# Altium PCB thymio2-main.PcbDoc (part 2 of 4)
Units mm, origin at the board's own origin, x right, y up, seen from the top; angles counter-clockwise.
Board outline 107 x 105.75 mm, 2 copper layers (Top Layer, Bottom Layer), stack 1.591 mm thick; 334 components, 247 nets, 987 pads, 487 vias.
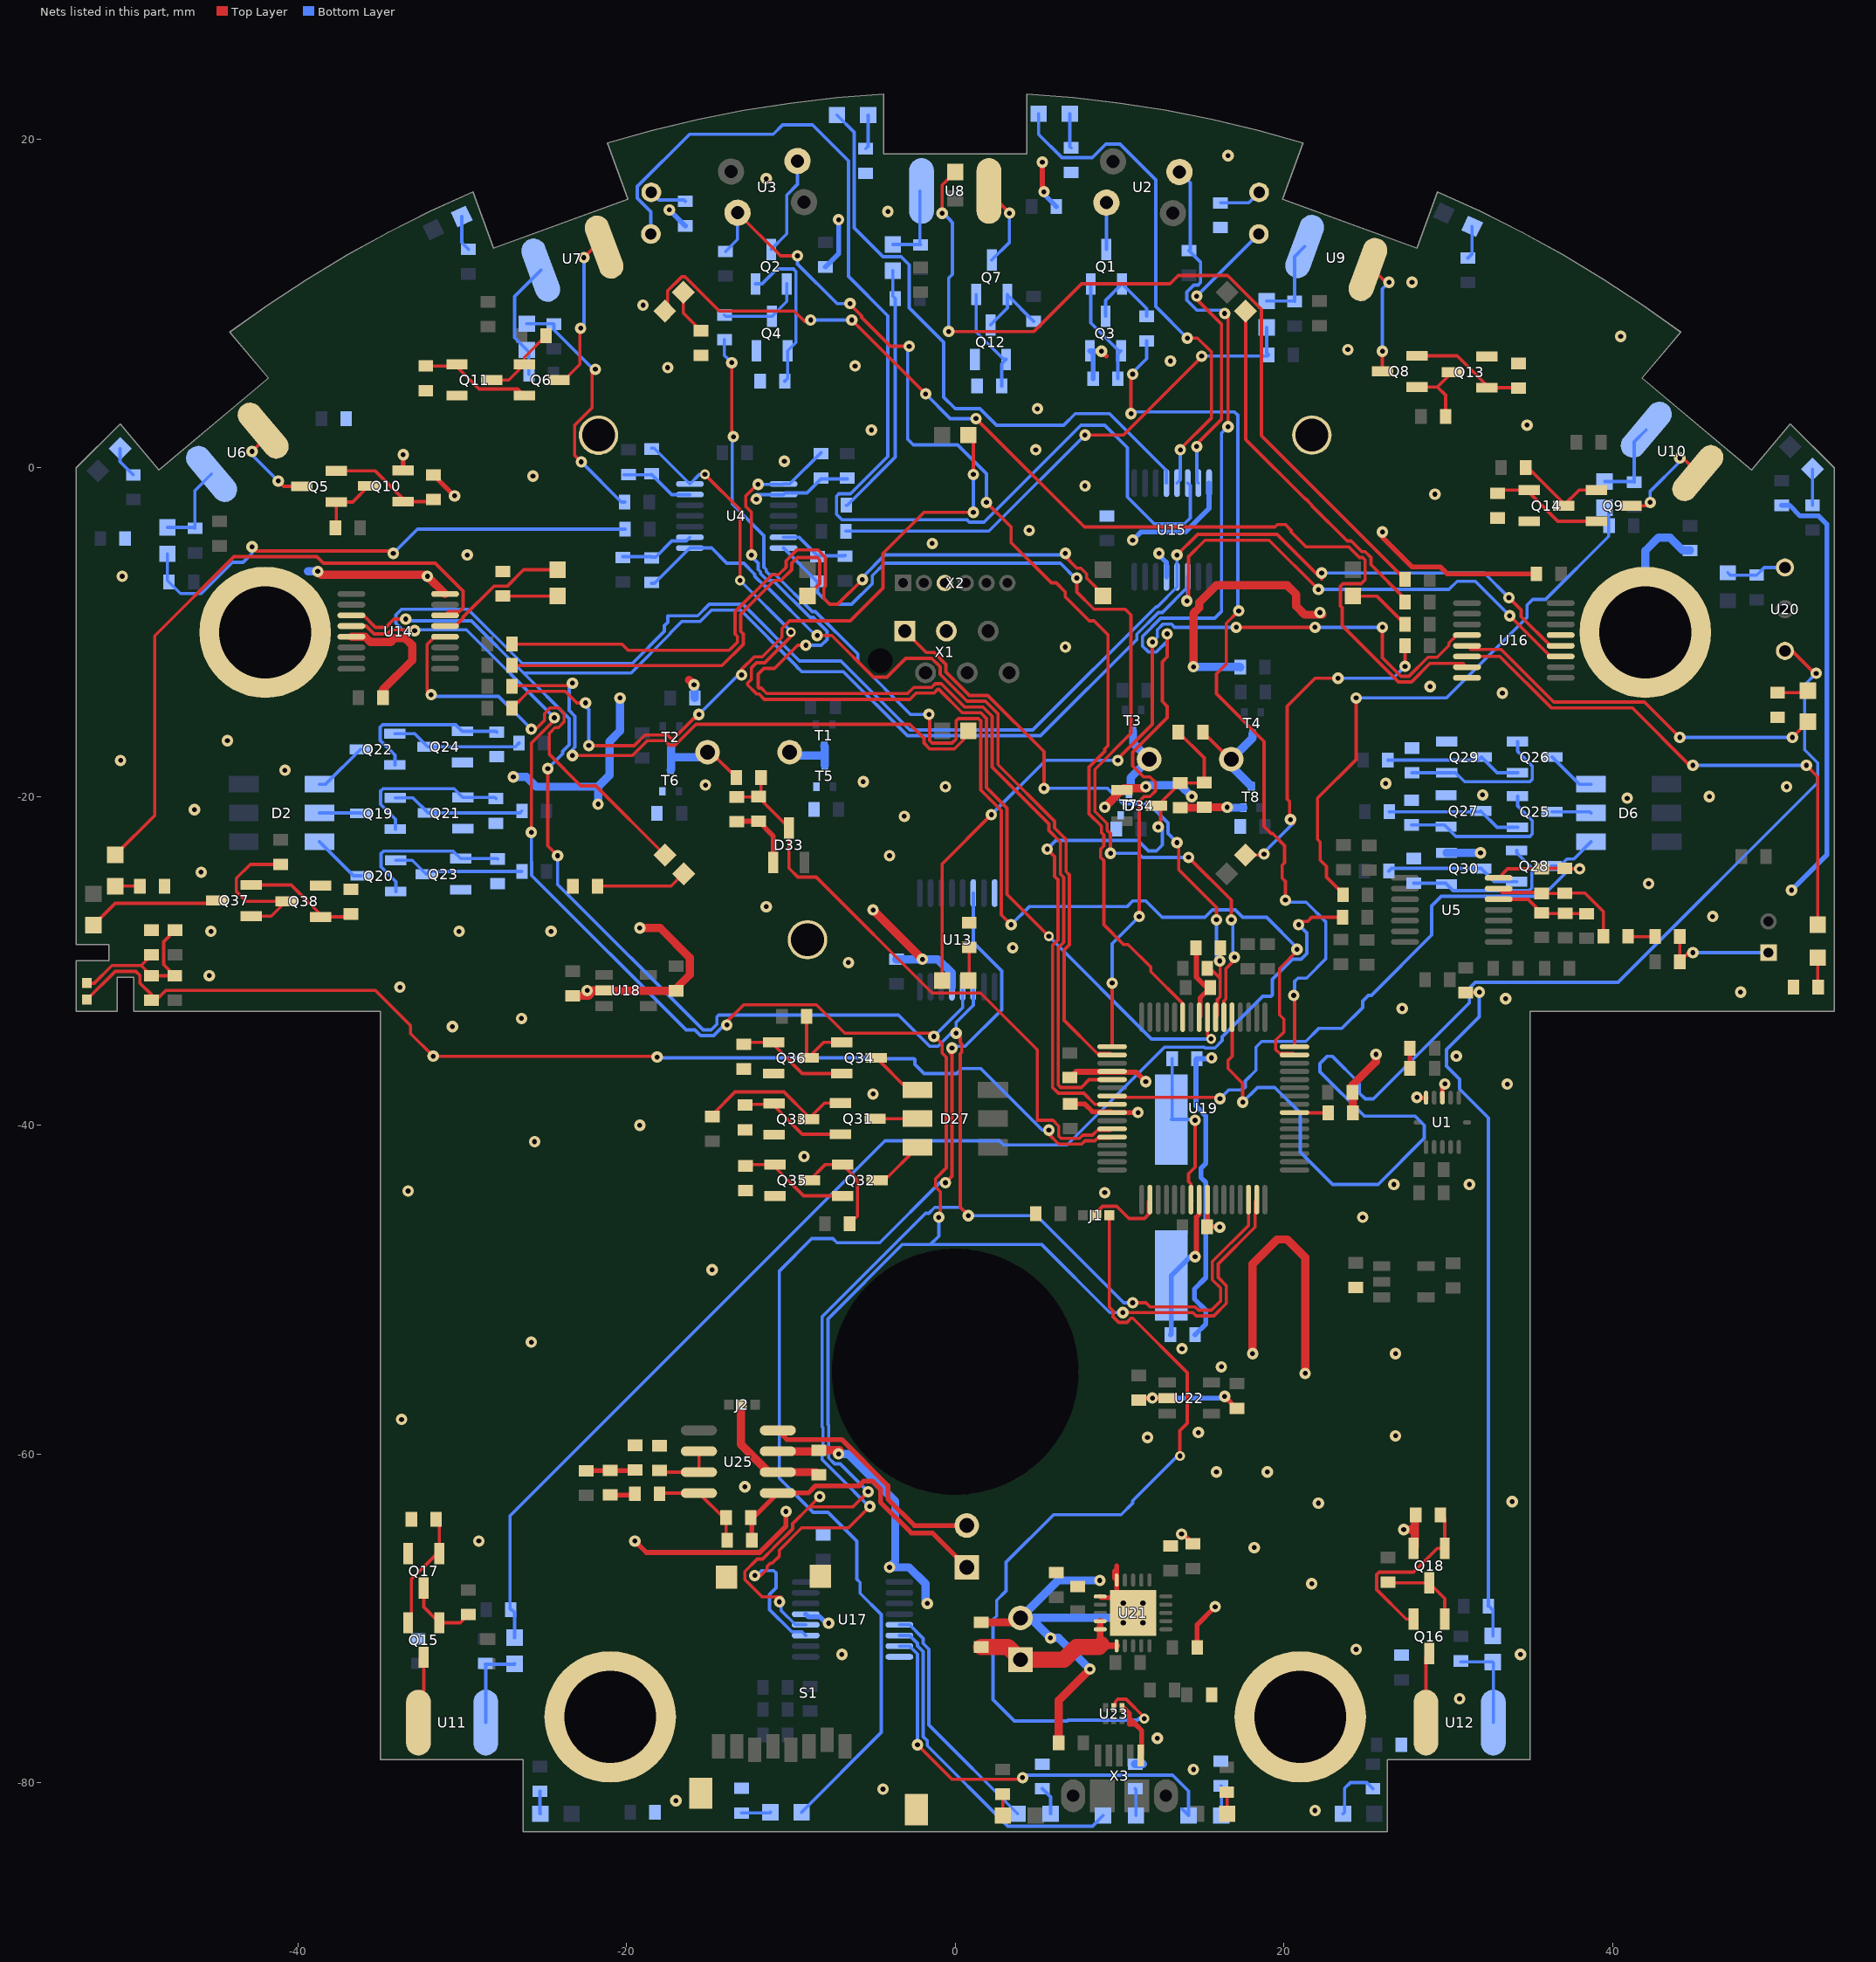
[diagram p2: the nets of this part, all layers, seen from the top]

## Via types
v1: diameter 0.7, hole 0.3, Top Layer to Bottom Layer, 458 vias
v2: diameter 0.6, hole 0.3, Top Layer to Bottom Layer, 25 vias
v3: diameter 0.66, hole 0.33, Top Layer to Bottom Layer, tented top, 4 vias

## Nets (pads, with @x,y where several pads share a name; then routed paths per layer and width w, separated by ;. In a path a pad name is that pad's centre, name@x,y a point inside that pad or via, vN(x,y) a via of type N, cw(c..) or ccw(c..) an arc to the next point about the centre after c; other vN are vias at no path point) (continued)
GND: BT1.2 C3.2 C4.2 C5.2 C7.2 C8.2 C9.2 C22.2 C25.2 C26.2 C27.2 C28.2 C29.2 C30.2 C31.2 C32.2 C33.2 C34.2 C35.2 C36.2 C37.2 C38.2 C39.2 C40.2 C41.2 C42.2 C44.2 C45.2 C46.2 C47.2 C48.2 C49.2 C51.2 C52.2 C53.2 C54.2 C59.1 C60.2 C61.2 C62.2 C68.2 C69.2 C70.2 C71.2 D33.1 D34.1 pad.0 pad.1@42,-10 pad.2 pad.3 Q3.2 Q4.2 Q10.2 Q11.2 Q12.2 Q13.2 Q14.2 Q17.2 Q18.2 Q21.2 Q23.2 Q24.2 Q27.2 Q29.2 Q30.2 Q33.2 Q35.2 Q36.2 Q38.2 R3.1 R5.1 R36.1 R37.1 R38.1 R39.1 R40.1 R54.1 R55.1 R66.1 R67.1 R68.1 R69.1 R70.1 R71.1 R72.1 R73.1 R82.1 R83.1 R84.1 R85.1 R86.1 R87.1 R88.1 R89.1 R95.1 R96.1 R97.1 R98.1 R99.1 R100.1 R108.1 R109.1 R110.1 R117.1 R118.1 R119.2 R120.2 R121.2 R122.2 R133.1 R134.1 R135.1 R138.1 R141.1 S1.S T5.2 T6.2 T7.2 T8.2 U1.8 U1.10 U13.8 U13.13 U14.8 U14.13 U15.8 U15.13 U16.8 U16.13 U17.8 U17.13 U18.2 U19.9 U19.20 U19.25 U19.41 U21.10 U21.11 U21.21 U22.2 U23.4 U25.7 X1.3 X2.3 X3.5 | length 294.5
  Top Layer w0.3: Q10.2@-33.6,-0.15 v1(-33.6,0.8) ; R36.1@-31.75,-0.425 v1(-30.475,-1.7) ; v1(-19.5,-65.3) -18.8,-66 -11.901,-66 -11.45,-65.549 -11.45,-65.541 -10.3,-64.391 v1(-10.3,-63.5) ; C53.2@-13.3,-21.525 -13.275,-21.5 R117.1@-11.975,-21.5 -11.075,-22.4 D33.1@-11.075,-24 ; v1(5.3,18.6) 5.3,16.9 v1(5.4,16.8) ; C35.2@6.975,-37.1 C35.2@7.3,-36.775 ; C39.2@7,-38.7 7.875,-38.7 8.35,-39.175 9.5,-39.175 U19.25@9.55,-39.225 v1(11.125,-39.225) ; U21.11@8.825,-68.675 8.9,-68.75 9.525,-68.75 10.45,-69.675 U21.21@10.825,-69.675 v3(10.225,-69.075) 9.825,-68.675 U21.10@9.825,-67.675 ; v1(8.9,7.1) 9.2,6.8 ; U19.20@9.55,-36.725 7.35,-36.725 C35.2@7.3,-36.775 ; 9.7,-67.143 9.7,-67.55 U21.10@9.825,-67.675 ; 9.825,-66.825 U21.10@9.825,-67.675 ; U23.4@10.15,-75.436 10.234,-75.436 10.609,-75.811 10.609,-76.09 ; C47.2@11.175,-56.725 11.3,-56.6 v1(12,-56.6) U22.2@12.9,-56.6 ; X3.5@11.3,-78.35 11.35,-78.3 11.35,-76.831 10.969,-76.45 ; v1(11.6,-37.35) 11.025,-36.775 C35.2@7.3,-36.775 ; v1(13.775,-64.875) 13.875,-64.875 R138.1@14.475,-65.475 ; C33.2@14.644,-29.194 14.675,-29.225 14.675,-30.999 15.301,-31.625 C38.2@15.525,-31.625 14.9,-32.25 14.9,-33.375 U19.9@14.85,-33.425 ; C44.2@14.725,-71.775 14.725,-70.394 v1(15.819,-69.3) ; U19.41@15.35,-44.525 15.35,-46.15 C36.2@15.325,-46.175 16.075,-46.175 v1(16.1,-46.2) ; v1(16.4,-56.5) 17.125,-57.225 C48.2@17.15,-57.225 ; v1(26,-3.9) 26,-4.219 27.806,-6.025 29.525,-6.025 29.95,-6.45 C29.2@35.375,-6.45 ; C3.2@27.675,-36.525 C4.2@27.675,-35.325 ; v1(28.1,-38.3) 28.125,-38.325 U1.10@28.65,-38.325 ; U1.8@29.65,-38.325 29.65,-37.635 v1(29.8,-37.485) ; 10.609,-76.09 10.969,-76.45 ; 10.609,-76.09 10.609,-76.45 10.969,-76.45
  Top Layer w0.5: v1(-38.8,-6.3) -38.6,-6.5 -32.225,-6.5 v1(-32.125,-6.6) U14.8@-31.05,-7.675 ; U14.13@-36.75,-10.275 -35.912,-10.275 -35.587,-10.6 -34.361,-10.6 -34.111,-10.35 -33.511,-10.35 -33.211,-10.65 -33.189,-10.65 -33.05,-10.789 -33.05,-11.706 -34.825,-13.481 C27.2@-34.825,-13.975 ; C31.2@-23.275,-32.125 -22.325,-32.125 -22.025,-31.825 ; U18.2@-21.375,-31.8 -22,-31.8 ; v1(-19.2,-28) -17.959,-28 -16.15,-29.809 -16.15,-30.841 -17,-31.691 C32.2@-17,-31.825 -22.025,-31.825 ; -16.2,-12.9 v1(-15.9,-13.2) ; U25.7@-10.8,-59.84 -8.365,-59.84 C61.2@-8.3,-59.775 -7.034,-59.775 -7.034,-59.934 v1(-7.1,-60) ; v1(-5,-26.9) v1(-2,-29.9) ; v1@-1.8,-69.1 v1(-1.7,-69.1) ; C45.2@1.575,-70.25 3.705,-70.25 BT1.2@3.975,-69.98 ; C46.2@6.3,-77.575 6.3,-75 v1(8.2,-73.1) ; v1(9.1,-20.65) D34.1@10.15,-19.6 10.25,-19.5 11.6,-19.5 v1(11.6,-19.4) ; C54.2@13.7,-20.675 15.125,-20.675 R118.1@15.15,-20.65 v1(16.55,-20.65) ; v1(14.5,-12.1) 14.5,-8.861 14.85,-8.511 14.85,-8.189 15.889,-7.15 20.211,-7.15 20.75,-7.689 20.75,-8.411 21.273,-8.934 22.354,-8.934 22.22,-8.8 v1(22.2,-8.8) ; v1(18.1,-53.9) 18.1,-48.439 19.589,-46.95 20.211,-46.95 21.3,-48.039 v1(21.3,-55.1) ; C34.2@24.2,-39.25 24.2,-38.025 C37.2@24.175,-38 24.175,-37.564 25.614,-36.125 v1(25.614,-35.686) ; v1(27.3,-64.6) 27.975,-64.6 ; Q18.2@27.9,-65.75 27.975,-65.675 27.975,-64.6 ; R55.1@27.975,-63.725 27.975,-64.6 ; -22.025,-31.825 -22,-31.8 ; -22.025,-31.825 -22.375,-31.825 v1(-22.4,-31.8) -22,-31.8
  Bottom Layer w0.3: v1(-17.4,15.7) R84.1@-16.425,14.725 ; U17.13@-9.1,-69.75 -8.925,-69.925 -8.228,-69.925 -7.853,-70.3 v1(-7.7,-70.3) ; C5.2@-7.9,12.225 -7.1,13.025 v1(-7.1,15.1) ; v1(5.4,16.8) 5.4,16.65 C7.2@6.15,15.9 ; R3.1@8.4,5.425 8.4,6.925 Q3.2@8.2,7.125 8.875,7.125 v1(8.9,7.1) ; v1(10.8,-4.4) 11.3,-3.9 14.014,-3.9 15.45,-2.464 U15.8@15.45,-0.925 ; v1(12,-56.6) 16.3,-56.6 v1(16.4,-56.5) ; v1(12.4,-5.2) 12.4,-5.3 12.85,-5.75 U15.13@12.85,-6.625 ; C42.2@14.6,-52.75 15.25,-52.1 15.25,-51.269 14.55,-50.569 14.55,-49.972 15.25,-49.272 15.25,-43.469 14.95,-43.169 14.95,-42.631 15.25,-42.331 15.25,-39.431 14.65,-38.831 14.65,-36 C41.2@14.7,-35.95 15.55,-35.95 v1(15.6,-35.9) ; v1(28.1,-38.3) v1@28.3,-38.3 ; v1(29.8,-37.485) v1@29.81,-37.485 ; C71.2@50.3,-2.275 50.775,-2.275 51.425,-2.925 52.549,-2.925 53.05,-3.426 53.05,-23.55 v1(50.9,-25.7)
  Bottom Layer w0.5: -39.4,-6.3 v1(-38.8,-6.3) ; v1(-26.9,-18.8) -26.1,-18.8 -25.5,-19.4 -21.739,-19.4 ; v1@-22.5,-31.8 v1(-22.4,-31.8) ; v1(-21.739,-20.461) -21.739,-19.4 ; v1(-20.4,-14) -20.4,-16.008 -21.05,-16.658 -21.05,-18.711 -21.739,-19.4 ; v1(-15.9,-13.2) -15.85,-13.25 C51.2@-15.85,-14 ; v1(-7.1,-60) -6.539,-60 -3.65,-62.889 -3.65,-66.55 v1(-4,-66.9) -2.812,-66.9 -1.8,-67.912 -1.8,-69 v1(-1.7,-69.1) ; C26.2@-3.575,-29.9 v1(-2,-29.9) -1.075,-29.9 -0.65,-30.325 -0.612,-30.325 -0.2,-30.737 U13.13@-0.2,-31.575 ; v1(8.2,-73.1) 6.3,-71.2 v1(5.8,-71.2) BT1.2@4.58,-69.98 ; v1(8.8,-67.7) 6.255,-67.7 BT1.2@3.975,-69.98 BT1.2@4.58,-69.98 ; v3(10.225,-70.275) 9.93,-69.98 BT1.2@4.58,-69.98 ; R96.1@10.95,-78.875 11.425,-78.875 ; v1(11.6,-19.4) 11.7,-19.3 13.7,-19.3 v1(14.4,-20) ; v1(14.5,-12.1) 17.325,-12.1 C52.2@17.35,-12.125 ; v1(16.55,-20.65) 16.575,-20.675 T8.2@17.525,-20.675 ; Q30.2@29.9,-23.425 v1(31.975,-23.425) ; pad.1@42,-10 42,-5.039 42.789,-4.25 43.511,-4.25 44.286,-5.025 C8.2@44.725,-5.025
  other v1: 21.9,-81.7 -17,-81.1 -4.4,-80.4 14.5,-79.2 12.3,-77.3 30.7,-74.9 -6.9,-72.2 34.4,-72.2 24.4,-71.9 21.7,-67.9 18.2,-65.7 -29,-65.3 22.1,-63 33.9,-62.9 -12.8,-62 15.9,-61.1 19,-61.1 11.7,-59 26.8,-58.9 14.8,-58.7 -33.7,-57.9 16.2,-54.7 26.8,-53.9 13.8,-53.6 -25.8,-53.2 -14.8,-48.8 24.8,-45.6 9.1,-44.1 -33.3,-44 26.7,-43.6 31.3,-43.6 -9.2,-41.9 -25.6,-41 -19.2,-40 -5,-38.1 33.6,-37.5 30.5,-35.8 -30.6,-34 -26.4,-33.5 27.2,-32.9 33.5,-32.3 47.8,-31.9 -33.8,-31.6 -45.4,-30.9 -6.5,-30.1 3.5,-29.2 -45.3,-28.2 -30.2,-28.2 -24.6,-28.2 46.1,-27.3 -11.5,-26.7 42.2,-25.3 -45.9,-24.6 -4,-23.6 -3.1,-21.2 -46.3,-20.8 40.9,-20.1 45.9,-20 32.1,-19.9 -0.6,-19.4 50.6,-19.4 -15.2,-19.3 26.2,-19.2 -5.6,-19.1 -40.8,-18.4 -50.8,-17.8 -44.3,-16.6 33.3,-13.7 28.9,-13.3 6.7,-10.9 -50.7,-6.6 -29.7,-5.3 -1.4,-4.6 4.5,-3.8 29.2,-1.6 7.9,-1.1 -25.7,-0.5 -10.4,0.4 4.9,1.1 22.3,2.2 -5.1,2.3 34.8,2.6 5,3.6 -17.5,6.1 -6.1,6.2 13.1,6.5 23.9,7.2 40.5,8 -19,9.9 27.8,11.3 -4.1,15.6 -11.5,17.6 16.6,19
  other v3: 11.425,-70.275 11.425,-69.075
INNTC2: R136.2 RT1.1 U19.28 | length 69.8
  Top Layer w0.2: RT1.1@-52.85,-32.35 -51.132,-30.632 -49.876,-30.632 -49.625,-30.883 -49.625,-31.354 -48.925,-32.054 R136.2@-48.925,-32.4 -48.654,-32.4 -48.054,-31.8 -35.281,-31.8 -33.15,-33.931 -33.15,-34.426 v1(-31.776,-35.8) -18.4,-35.8 -18.3,-35.9 -18.25,-35.85 v1(-18.148,-35.85) ; v1(5.7,-40.3) 5.7,-40.549 6.301,-41.15 7.699,-41.15 7.899,-40.95 8.504,-40.95 8.654,-40.8 9.475,-40.8 U19.28@9.55,-40.725
  Bottom Layer w0.2: v1(-18.148,-35.85) -18.25,-35.85 -18.3,-35.9 -5.195,-35.9 -5.145,-35.95 -2.493,-35.95 -2.45,-35.993 -2.45,-36.293 -1.893,-36.85 0.088,-36.85 0.387,-36.551 1.549,-36.551 5.297,-40.3 v1(5.7,-40.3)
IR_RECEIVER: U19.5 U20.1 | length 81.2
  Top Layer w0.2: U19.5@16.85,-33.425 16.85,-35.801 16.6,-36.051 16.6,-36.548 17.5,-37.448 v1(17.5,-38.6) ; U20.1@50.5,-11.14 50.94,-11.14 v1@52.35,-12.55
  Bottom Layer w0.2: v1(17.5,-38.6) 18.4,-37.7 19.449,-37.7 21,-39.251 21,-40.561 21,-41.638 22.962,-43.6 25.743,-43.6 28.55,-40.793 28.55,-40.006 27.993,-39.45 24.901,-39.45 22.2,-36.748 22.2,-36.251 22.651,-35.8 22.949,-35.8 24.6,-37.451 24.6,-38.048 24.951,-38.4 25.448,-38.4 31.3,-32.548 31.3,-31.651 31.651,-31.3 40.348,-31.3 52.5,-19.148 52.5,-17.951 51.7,-17.151 51.7,-13.2 v1(52.4,-12.5)
LED_CLK: U13.11 U14.11 U15.11 U16.11 U17.11 U19.46 | length 216.1
  Top Layer w0.2: U14.11@-36.75,-8.975 -36.01,-8.975 -35.285,-9.7 -34.663,-9.7 -34.163,-9.2 v1(-33.45,-9.2) ; v1(-24.8,-18.3) -24.8,-23 v1(-24.2,-23.6) ; -11.849,-67.4 -11.45,-67.001 -11.45,-66.855 -11.245,-66.65 ; -11.145,-66.65 -10.7,-66.205 -10.7,-65.851 -9.348,-64.5 -6.5,-64.5 v1(-5.2,-63.2) ; 0.3,-34.651 0.3,-34.951 0.4,-35.051 0.4,-35.548 0.3,-35.648 0.3,-45 v1(0.8,-45.5) ; v1(10.802,-50.8) 11.605,-50.8 11.855,-51.05 14.607,-51.05 14.806,-51.25 15.593,-51.25 16.15,-50.693 16.15,-49.906 15.65,-49.406 15.65,-48.293 17.85,-46.093 U19.46@17.85,-44.525 ; v1(14.1,-8.1) 14.2,-8 14.2,-5.401 15.201,-4.4 19.1,-4.4 v1(22.1,-7.4) ; v1(33.749,-9) 36.224,-11.475 U16.11@36.85,-11.475
  Bottom Layer w0.2: v1(-33.45,-9.2) -33.5,-9.2 -33.4,-9.3 -29.451,-9.3 -26.276,-12.476 ; v1(-24.8,-18.3) -23.9,-17.4 -23.9,-17.249 -23.5,-16.849 -23.5,-15.251 -26.276,-12.476 ; v1(-24.2,-23.6) -24.2,-25.349 -15.349,-34.2 -14.851,-34.2 -14.5,-33.849 -14.5,-33.4 -14.4,-33.3 -3.449,-33.3 -1.549,-35.2 -1.051,-35.2 -0.253,-34.401 v1(0.05,-34.401) 0.05,-33.75 1.1,-32.7 U13.11@1.1,-31.575 ; v1@-12.1,-67.4 -11.8,-67.1 -11.051,-67.1 -10.9,-67.251 -10.9,-68.151 -11.3,-68.551 -11.3,-69.476 -9.951,-70.825 -9.325,-70.825 U17.11@-9.1,-71.05 ; -8.1,-59.795 -8.1,-60.343 -6.15,-62.293 -6.15,-62.299 v1@-5.249,-63.2 ; -8.1,-58.355 -8.1,-51.645 -1.807,-45.351 -1.6,-45.351 -1.249,-45 0.3,-45 v1(0.8,-45.5) 4.952,-45.5 10.252,-50.8 v1(10.802,-50.8) ; -8.05,-59.745 -8.05,-58.405 ; v1(14.1,-8.1) 14.15,-8.05 U15.11@14.15,-7.251 ; U15.11@14.15,-6.625 U15.11@14.15,-7.251 ; v1(22.1,-7.4) 30.051,-7.4 30.551,-6.9 31.649,-6.9 v1(33.749,-9) ; -26.276,-12.476 -19.732,-12.476 -17.35,-10.093 -17.35,-10.05 -16.65,-9.35 -15.525,-9.35 -14.825,-8.65 -13.075,-8.65 -9.65,-12.075 -9.65,-12.088 -9.338,-12.4 -6.806,-12.4 -2.906,-16.3 5.195,-16.3 11.05,-10.445 11.05,-10.112 12.362,-8.8 12.601,-8.8 U15.11@14.15,-7.251
  other v1: -12.2,-67.4
LED_CS: U13.12 U14.12 U15.12 U16.12 U17.12 U19.47 | length 226.3
  Top Layer w0.2: U14.12@-36.75,-9.625 -35.855,-9.625 -35.38,-10.1 -34.568,-10.1 -34.318,-9.85 -32.95,-9.85 v1(-32.9,-9.9) ; v1(-25.8,-22.175) -25.8,-16.749 -24.4,-15.349 v1(-24.4,-15.2) ; v1(-13.9,-33.9) -13.9,-33.7 -12.875,-32.675 -8.45,-32.675 -6.725,-34.4 -1.5,-34.4 v1(-1.3,-34.6) -1.251,-34.6 -0.8,-35.051 -0.8,-35.605 -0.55,-35.855 -0.55,-42.601 -1.2,-43.251 -1.2,-43.749 -0.9,-44.049 -0.9,-45.5 v1(-1,-45.6) ; v1(-10.7,-69) -10.6,-68.9 -10.6,-68.7 -11.748,-68.7 -12.8,-67.648 -12.8,-67.151 -12.049,-66.4 -11.735,-66.4 -11.05,-65.715 -11.05,-65.707 -9.9,-64.557 -9.9,-64.251 -8.874,-63.226 ; v1(-8.249,-62.6) -8.874,-63.226 ; v1(-5.3,-62.3) -6.226,-63.226 -8.874,-63.226 ; v1(10.2,-51.4) 14.462,-51.4 14.661,-51.6 15.738,-51.6 16.5,-50.838 16.5,-49.761 16,-49.261 16,-48.438 18.25,-46.188 18.25,-44.625 U19.47@18.35,-44.525 ; v1(13.5,-5.3) 14.75,-4.05 19.599,-4.05 v1@22.124,-6.576 ; 22.3,-6.751 v1(22.3,-6.4) ; v1(33.7,-7.9) 34.45,-8.65 34.45,-9.051 36.224,-10.825 U16.12@36.85,-10.825
  Bottom Layer w0.2: v1(-25.8,-22.175) -25.8,-23.946 -25.775,-23.971 -25.775,-24.804 -16.379,-34.2 -15.843,-34.2 -15.493,-34.55 -14.707,-34.55 -13.9,-33.743 -13.9,-33.7 v1(-13.9,-33.9) ; v1(-24.4,-15.2) -29.75,-9.85 -32.85,-9.85 v1(-32.9,-9.9) -33.598,-9.9 -34.05,-9.449 -34.05,-8.951 -33.698,-8.6 -29.657,-8.6 -26.357,-11.9 -19.651,-11.9 -17.7,-9.949 -17.7,-9.6 -17.5,-9.4 -17.5,-9 -15.67,-9 -14.97,-8.3 -12.93,-8.3 -9.48,-11.75 -6.961,-11.75 -2.761,-15.95 4.717,-15.95 12.217,-8.45 12.301,-8.45 13.5,-7.251 U15.12@13.5,-6.625 v1(13.5,-5.3) ; v1(-10.7,-69) v1@-10.6,-68.9 ; U17.12@-9.1,-70.4 -9.726,-70.4 -10.6,-69.526 v1@-10.6,-68.9 ; v1(-5.3,-62.3) -7,-60.6 -7.349,-60.6 -7.7,-60.248 -7.7,-58.26 -7.75,-58.21 -7.75,-51.79 -3.21,-47.25 -1.5,-47.25 ; v1(-1.3,-34.6) 0.45,-32.85 U13.12@0.45,-31.575 ; v1(-1,-45.6) -1,-46.75 -1.5,-47.25 ; v1(10.2,-51.4) 9.4,-51.4 5.25,-47.25 -1.5,-47.25 ; v1(22.3,-6.4) 32.2,-6.4 v1(33.7,-7.9) ; v1@-10.6,-68.9 -10.6,-68.7 v1@-10.6,-68.9
NetB1_1: B1.1 R115.2 T2.3 T6.3 | length 6.1
  Top Layer w0.2: B1.1@-15.075,-17.3 -14.875,-17.3 R115.2@-13.325,-18.85
  Bottom Layer w0.5: T6.3@-17.325,-18.375 -17.3,-18.35 -17.3,-17.6 ; T2.3@-17.3,-17.025 -17.3,-17.6 ; B1.1@-15.075,-17.3 -15.375,-17.6 -17.3,-17.6
NetB1_2: B1.2 T1.3 T5.3 | length 3.4
  Bottom Layer w0.5: B1.2@-10.075,-17.3 -9.875,-17.5 -7.95,-17.5 ; T1.3@-7.975,-16.925 -7.95,-16.95 -7.95,-17.5 ; T5.3@-7.95,-18.1 -7.95,-17.5
NetB2_1: B2.1 R116.2 T4.3 T8.3 | length 7.3
  Top Layer w0.2: R116.2@15.075,-16.075 16.725,-17.725 B2.1@16.8,-17.725
  Bottom Layer w0.2: B2.1@16.15,-17.725 B2.1@16.8,-17.725
  Bottom Layer w0.5: T8.3@18.025,-19.375 16.8,-18.15 B2.1@16.8,-17.725 18.1,-16.425 T4.3@18.1,-16.175
NetB2_2: B2.2 T3.3 T7.3 | length 4.3
  Bottom Layer w0.5: 10.675,-19.5 10.675,-18.85 B2.2@11.8,-17.725 10.825,-16.75 T3.3@10.825,-16.025
NetBT1_1: BT1.1 C45.1 U21.14 U21.15 U21.16 | length 10.4
  Top Layer w0.4: U21.14@8.825,-70.175 8.825,-71.525 8.9,-71.6 8.975,-71.675 U21.16@9.825,-71.675
  Top Layer w1: C45.1@1.575,-71.75 3.205,-71.75 BT1.1@3.975,-72.52 6.619,-72.52 7.389,-71.75 8.75,-71.75 8.9,-71.6
NetC15_1: C15.1 R12.1 U6.3 | length 5.4
  Bottom Layer w0.2: C15.1@-47.95,-3.625 -46.325,-3.625 R12.1@-46.275,-3.675 -46.275,-1.382 U6.3@-45.263,-0.37
NetC15_2: C15.2 R17.1 R27.1 | length 32
  Top Layer w0.2: v1(-42.8,-4.8) -42.55,-5.05 -34.35,-5.05 v1(-34.2,-5.2)
  Bottom Layer w0.2: C15.2@-47.95,-5.225 -47.95,-6.85 R27.1@-47.85,-6.95 -47.15,-7.65 -45.896,-7.65 -43.996,-5.75 -43.35,-5.75 -42.8,-5.2 v1(-42.8,-4.8) ; v1(-34.2,-5.2) -32.725,-3.725 R17.1@-20.1,-3.725
NetC16_1: C16.1 R13.1 U7.3 | length 7.4
  Bottom Layer w0.2: R13.1@-25.95,5.7 -25.95,7.05 C16.1@-26.075,7.175 -26.825,7.925 -26.825,10.432 U7.3@-25.225,12.031
NetC16_2: C16.2 R18.1 R28.1 | length 15.7
  Top Layer w0.2: v1(-22.761,0.361) -23.161,0.761 -23.161,2.591 -22.1,3.652 -22.1,6 v1(-21.9,6)
  Bottom Layer w0.2: C16.2@-26.075,8.775 -24.45,8.775 R28.1@-24.425,8.75 -24.425,8.404 -22.1,6.079 -22.1,6 v1(-21.9,6) ; v1(-22.761,0.361) -20.325,-2.075 R18.1@-20.125,-2.075
NetC17_1: C17.1 R14.1 U8.3 | length 5
  Bottom Layer w0.2: C17.1@-3.8,13.6 R14.1@-2.125,13.6 ; U8.3@-2.15,16.85 -2.15,13.625 R14.1@-2.125,13.6 ; R14.1@-2.1,13.575 R14.1@-2.125,13.6
NetC17_2: C17.2 R19.1 R29.1 | length 15.6
  Bottom Layer w0.2: R19.1@-6.625,-2.275 -6.576,-2.275 -3.65,0.651 R29.1@-3.65,10.3 -3.8,10.45 C17.2@-3.8,12
NetC18_1: C18.1 R15.1 U9.3 | length 5.3
  Bottom Layer w0.2: C18.1@18.95,10.15 20.625,10.15 R15.1@20.65,10.125 20.65,12.853 U9.3@21.269,13.472
NetC18_2: C18.2 R20.1 R30.1 | length 31.9
  Top Layer w0.2: v1(7.9,2) 10.249,2 15,6.751 v1(15,6.8)
  Bottom Layer w0.2: R20.1@-6.65,-3.85 2.05,-3.85 v1(7.9,2) ; v1(15,6.8) 19,6.8 R30.1@19.075,6.875 18.95,7 C18.2@18.95,8.55
NetC19_1: C19.1 R16.1 U10.3 | length 5.3
  Bottom Layer w0.2: C19.1@39.525,-0.825 41.275,-0.825 R16.1@41.325,-0.875 41.325,1.587 U10.3@42.058,2.32
NetC19_2: C19.2 R26.1 R31.1 | length 35.4
  Top Layer w0.2: R26.1@23.625,-26 R26.1@23.6,-25.975 23.6,-25.905 22.6,-24.905 22.6,-24.254 22.214,-23.868 22.214,-22.765 22.05,-22.601 22.05,-20.1 24.4,-17.75 v1(24.4,-14)
  Bottom Layer w0.2: v1(24.4,-14) 29.9,-14 34.8,-9.1 34.8,-8.351 35.151,-8 35.938,-8 39.775,-4.163 39.775,-2.675 C19.2@39.525,-2.425
NetC20_1: C20.1 R44.1 U11.3 | length 5.3
  Bottom Layer w0.2: U11.3@-28.571,-76.35 -28.571,-72.829 -28.6,-72.8 -26.85,-72.8 C20.1@-26.825,-72.775
NetC20_2: C20.2 R46.1 R50.1 | length 76.3
  Top Layer w0.2: v1(20.9,-27.8) 20.7,-27.6 21.45,-27.6 21.7,-27.35 R46.1@23.575,-27.35
  Bottom Layer w0.2: R50.1@-27.05,-69.475 -27.1,-69.425 -27.1,-63.772 -4.278,-40.95 2.7,-40.95 2.95,-41.2 6.796,-41.2 12.746,-35.25 15.154,-35.25 15.203,-35.3 15.351,-35.3 15.804,-35.3 16.25,-34.854 16.25,-34.616 18.717,-32.15 19.228,-32.15 19.3,-32.078 19.3,-31.123 20.523,-29.9 21.048,-29.9 21.4,-29.548 21.4,-28.3 v1(20.9,-27.8) ; R50.1@-27,-69.475 -26.825,-69.65 C20.2@-26.825,-71.175
NetC21_1: C21.1 R45.1 U12.3 | length 5.6
  Bottom Layer w0.2: R45.1@30.775,-72.65 32.7,-72.65 C21.1@32.725,-72.675 32.752,-72.702 U12.3@32.752,-76.35
NetC21_2: C21.2 R47.1 R51.1 | length 42
  Top Layer w0.2: R47.1@31.075,-31.925 31.875,-31.925 v1(31.9,-31.9)
  Bottom Layer w0.2: v1(31.9,-31.9) 31.9,-33.4 29.9,-35.4 29.9,-36.4 30.7,-37.2 30.7,-37.8 32.45,-39.55 R51.1@32.45,-69.275 ; R51.1@32.5,-69.275 32.725,-69.5 C21.2@32.725,-71.075
NetC33_1: C33.1 R101.1 U19.7 X1.1 | length 37.8
  Top Layer w0.2: X1.1@-3.075,-9.93 -1.77,-11.235 -1.293,-11.235 -0.57,-11.958 -0.57,-12.417 0.863,-13.85 1.983,-13.85 5.4,-17.267 v1(5.4,-19.5) ; v1(13.5,-22.8) 13.6,-22.9 13.6,-24.451 15.9,-26.751 v1(15.9,-27.5) ; R101.1@15.35,-30.45 15.504,-30.45 16.125,-31.071 ; U19.7@15.85,-33.425 15.95,-33.325 15.95,-32.354 16.125,-32.179 16.125,-31.071 ; v1(16.1,-30) v1@16.125,-30 ; C33.1@16.144,-29.194 16.125,-29.214 v1@16.125,-30 ; 16.125,-31.071 v1@16.125,-30
  Bottom Layer w0.2: v1(5.4,-19.5) 9.27,-19.5 10.22,-20.45 12.15,-20.45 12.15,-20.801 12.95,-21.601 12.95,-22.25 v1(13.5,-22.8) ; v1(15.9,-27.5) 15.9,-29.775 16.1,-29.975 v1(16.1,-30)
NetC34_1: C34.1 U19.56 | length 2.1
  Top Layer w0.2: U19.56@20.65,-39.225 20.675,-39.25 C34.1@22.7,-39.25
NetC41_1: C41.1 U19.39 Y1.2 | length 10.4
  Top Layer w0.2: U19.39@14.425,-44.6 U19.39@14.35,-44.525 14.35,-43.573 14.2,-43.423 14.2,-42.951 14.6,-42.551 v1(14.6,-39.7)
  Bottom Layer w0.2: C41.1@13.2,-35.95 13.2,-39.6 Y1.2@13.15,-39.65 14.55,-39.65 v1(14.6,-39.7)
NetC42_1: C42.1 U19.40 Y1.1 | length 9.4
  Top Layer w0.2: U19.40@14.8,-44.475 U19.40@14.85,-44.525
  Top Layer w0.3: v1(14.6,-48) 14.8,-48 14.675,-47.875 14.675,-45.586 14.85,-45.411 U19.40@14.85,-44.525
  Bottom Layer w0.3: C42.1@13.1,-52.75 13.15,-52.7 Y1.1@13.15,-49.15 14.3,-48 v1(14.6,-48)
NetC43_1: C43.1 R105.1 U20.3 | length 3.7
  Bottom Layer w0.2: R105.1@47.025,-6.375 47.175,-6.525 C43.1@48.775,-6.525 49.24,-6.06 U20.3@50.5,-6.06
NetC53_1: C53.1 D33.3 R115.1 R117.2 U19.27 | length 37.3
  Top Layer w0.2: C53.1@-13.3,-20.025 -12,-20.025 R117.2@-11.975,-20 ; R115.1@-11.825,-18.85 -11.825,-19.85 R117.2@-11.975,-20 ; U19.27@9.55,-40.225 9.45,-40.325 8.634,-40.325 8.359,-40.6 7.754,-40.6 7.554,-40.8 6.446,-40.8 6.3,-40.654 6.3,-40.549 6.3,-40.051 5.949,-39.7 5,-39.7 5,-35.405 1.545,-31.95 -1.404,-31.95 -8.454,-24.9 -9.579,-24.9 -10.125,-24.354 D33.3@-10.125,-21.9 -11.975,-20.05 R117.2@-11.975,-20
NetC54_1: C54.1 D34.3 R116.1 R118.2 U19.24 | length 36.7
  Top Layer w0.2: v1(5.6,-23.2) 6.05,-23.65 6.05,-24.858 6.25,-25.058 6.25,-28.728 5.925,-29.053 5.925,-37.699 6.276,-38.05 7.825,-38.05 8.5,-38.725 U19.24@9.55,-38.725 ; v1(12.35,-21.85) 12.421,-21.85 12.5,-21.929 12.5,-20.8 D34.3@12.25,-20.55 12.325,-20.55 C54.1@13.7,-19.175 15.125,-19.175 R118.2@15.15,-19.15 15.15,-17.65 R116.1@13.575,-16.075
  Bottom Layer w0.2: v1(5.6,-23.2) 6.125,-22.675 11.126,-22.675 11.751,-23.3 12.249,-23.3 12.6,-22.948 12.6,-22.029 12.421,-21.85 v1(12.35,-21.85)
NetC56_1: C56.1 MC1.1 R126.1 | length 7.2
  Top Layer w0.2: C56.1@44.1,-28.525 R126.1@44.1,-30.05 44.65,-29.5 v1(44.9,-29.5)
  Bottom Layer w0.2: v1(44.9,-29.5) MC1.1@49.5,-29.5
NetC56_2: C56.2 R127.2 | length 1.7
  Top Layer w0.2: R127.2@40.95,-28.5 40.975,-28.525 C56.2@42.6,-28.525
NetC57_1: C57.1 R130.1 R132.2 U25.4 | length 6.1
  Top Layer w0.2: R132.2@-18,-62.425 -17.955,-62.38 U25.4@-15.6,-62.38 -14.105,-63.875 R130.1@-13.95,-63.875 -13.95,-65.175 C57.1@-13.875,-65.25
NetC57_2: C57.2 LS1.1 R130.2 U25.5 | length 18
  Top Layer w0.3: R130.2@-12.45,-63.875 -12.295,-63.875 U25.5@-10.8,-62.38 -8.948,-62.38 -8.518,-61.95 -5.869,-61.95 -5.569,-61.65 -5.031,-61.65 -4.55,-62.131 -4.55,-62.938 -2.678,-64.81 -1.39,-64.81 LS1.1@0.7,-66.9 ; C57.2@-12.375,-65.25 R130.2@-12.375,-63.95
NetC58_1: C58.1 C59.2 R131.2 | length 3
  Top Layer w0.3: R131.2@-22.45,-61.025 -19.525,-61.025 C59.2@-19.475,-60.975
NetC58_2: C58.2 R132.1 | length 1.5
  Top Layer w0.3: C58.2@-21,-62.5 -19.575,-62.5 R132.1@-19.5,-62.425
NetC60_1: C60.1 U25.2 U25.3 | length 3.7
  Top Layer w0.2: C60.1@-18,-61 -17.89,-61.11 U25.3@-15.6,-61.11 U25.2@-15.6,-59.84
NetC61_1: C61.1 J2.2 U25.6 | length 8
  Top Layer w0.5: J2.2@-12.975,-57 -12.975,-57.119 -13.05,-57.194 -13.05,-59.411 -11.351,-61.11 U25.6@-10.8,-61.11 -8.465,-61.11 C61.1@-8.3,-61.275
NetC62_1: C62.1 R102.1 R136.1 R137.1 RT1.2 | length 10.3
  Top Layer w0.2: RT1.2@-52.85,-31.35 -52.396,-31.35 -51.328,-30.282 -49.543,-30.282 ; C62.1@-48.925,-29.625 -48.925,-29.664 -49.543,-30.282 ; R137.1@-47.475,-28.125 -48.175,-28.825 -48.175,-30.225 R102.1@-47.5,-30.9 R136.1@-48.925,-30.9 -49.543,-30.282
NetC64_1: C64.1 R125.1 R127.1 U5.13 | length 8.5
  Top Layer w0.2: U5.13@33.075,-25.6 33.3,-25.825 35.625,-25.825 R125.1@35.7,-25.9 37.075,-25.9 C64.1@37.1,-25.875 38.329,-25.875 39.45,-26.996 R127.1@39.45,-28.5
NetC64_2: C64.2 R125.2 U5.14 U19.23 | length 41.8
  Top Layer w0.2: U19.23@9.55,-38.225 9.625,-38.3 16,-38.3 16.1,-38.4 v1(16.114,-38.386) ; U5.14@33.075,-24.95 33.625,-24.4 R125.2@35.7,-24.4 35.725,-24.375 C64.2@37.1,-24.375 37.125,-24.4 v1(38,-24.4)
  Bottom Layer w0.2: v1(16.114,-38.386) 16.65,-37.85 17.475,-37.85 17.65,-37.675 17.65,-37.304 18.3,-36.654 18.3,-35.748 18.3,-35.251 18.651,-34.9 21.335,-34.9 22.135,-34.1 23.538,-34.1 24.8,-32.838 24.8,-32.451 25.151,-32.1 25.326,-32.1 29,-28.426 29,-26.651 29.576,-26.075 35.729,-26.075 37.404,-24.4 v1(38,-24.4)
NetC66_1: C66.1 R128.1 R129.2 U5.12 | length 5.7
  Top Layer w0.2: U5.12@33.075,-26.25 34.875,-26.25 R128.1@35.7,-27.075 35.75,-27.125 R129.2@38.425,-27.125
NetD1_1: D1.1 R56.2 | length 44
  Top Layer w0.2: R56.2@-26.975,-14.625 -25.95,-13.6 -23.737,-13.6 -23.037,-14.3 v1(-22.5,-14.3) ; v1(-22.3,-16.9) -19.533,-16.9 -18.883,-16.25 -17.517,-16.25 -17.241,-16.526 -17.2,-16.526 -15.924,-15.25 -15.85,-15.25 v1(-15.6,-15) ; v1(-13,-12.6) -13,-12.262 -12.238,-11.5 -11.743,-11.5 -10.55,-10.306 -10.55,-9.772 -10.078,-9.3 -6.384,-9.3 -4.401,-7.318 -4.401,-5.201 -1.9,-2.7 v1(1.1,-2.7) ; D1.1@0.8,2 1.1,1.7 v1(1.1,-0.4)
  Bottom Layer w0.2: v1(-22.5,-14.3) -22.6,-14.4 -22.3,-14.7 v1(-22.3,-16.9) ; v1(-15.6,-15) -13.2,-12.6 v1(-13,-12.6) ; v1(1.1,-2.7) v1(1.1,-0.4)
NetD2_1: D2.1 Q22.3 | length 3.4
  Bottom Layer w0.2: D2.1@-38.7,-19.25 -38.325,-19.25 Q22.3@-36.2,-17.125
NetD2_2: D2.2 Q19.3 | length 2.5
  Bottom Layer w0.2: D2.2@-38.7,-21 -36.2,-21 Q19.3@-36.175,-21.025
NetD2_3: D2.3 Q20.3 | length 3.4
  Bottom Layer w0.2: D2.3@-38.7,-22.75 -36.625,-24.825 Q20.3@-36.15,-24.825
NetD3_1: D3.1 R58.2 | length 35
  Top Layer w0.2: R58.2@-26.975,-13.3 -26.925,-13.25 -23.45,-13.25 v1(-23.3,-13.1) ; v1(-23.3,-17.5) -19.638,-17.5 -18.738,-16.6 -17.661,-16.6 -17.386,-16.876 -17.055,-16.876 -15.779,-15.6 -2.759,-15.6 -1.9,-16.459 -1.9,-16.749 -1.549,-17.1 -0.051,-17.1 0.8,-16.249 D3.1@0.8,-16
  Bottom Layer w0.2: v1(-23.3,-17.5) -23.355,-17.445 -23.355,-17.199 -23.15,-16.993 -23.15,-15.107 -23.5,-14.756 -23.5,-13.3 v1(-23.3,-13.1)
NetD4_1: D4.1 R60.2 | length 25.5
  Top Layer w0.2: R60.2@-26.975,-12.025 -14.193,-12.025 -13.518,-11.35 -13.506,-11.35 -12.904,-10.747 -12.904,-10.104 -13.05,-9.957 -13.05,-8.896 -11.007,-6.853 -10.61,-6.853 -9.95,-6.193 -9.95,-5.796 -9.604,-5.45 -8.396,-5.45 -8.25,-5.596 -8.25,-7.05 D4.1@-9,-7.8
NetD5_1: D5.1 R62.2 | length 46
  Top Layer w0.2: R62.2@-26.975,-10.725 -20.282,-10.725 -19.907,-11.1 -13.763,-11.1 -13.663,-11 -13.651,-11 -13.254,-10.602 -13.254,-10.249 -13.4,-10.102 -13.4,-8.751 -11.152,-6.503 -10.755,-6.503 -10.3,-6.049 -10.3,-5.651 -9.632,-4.983 -8.368,-4.983 -7.9,-5.451 -7.9,-7.195 -8,-7.295 -8,-7.949 -7.649,-8.3 -7.151,-8.3 v1(-5.651,-6.8) ; v1(6.7,-5.2) 6.6,-5.3 7.4,-6.1 7.649,-6.1 8,-6.451 8,-6.7 9,-7.7 D5.1@9,-7.8
  Bottom Layer w0.2: v1(-5.651,-6.8) -5.651,-6.659 -4.293,-5.3 6.6,-5.3 v1(6.7,-5.2)
NetD6_1: D6.1 Q28.3 | length 3
  Bottom Layer w0.2: Q28.3@36.275,-24.225 36.804,-24.225 37.229,-23.8 37.65,-23.8 D6.1@38.7,-22.75
NetD6_2: D6.2 Q25.3 | length 2.4
  Bottom Layer w0.2: Q25.3@36.325,-20.925 38.625,-20.925 D6.2@38.7,-21
NetD6_3: D6.3 Q26.3 | length 3.1
  Bottom Layer w0.2: Q26.3@36.325,-17.6 37.975,-19.25 D6.3@38.7,-19.25
NetD7_1: D7.1 R66.2 | length 1.9
  Top Layer w0.2: R66.2@50.05,-13.675 51.775,-13.675 D7.1@51.9,-13.55
NetD7_2: D7.2 U16.5 | length 23.5
  Top Layer w0.2: U16.5@31.15,-10.825 31.375,-11.05 33.22,-11.05 36.42,-14.25 41.95,-14.25 v1(44.1,-16.4) ; v1(50.95,-16.4) D7.2@51.9,-15.45
  Bottom Layer w0.2: v1(44.1,-16.4) v1(50.95,-16.4)
NetD8_1: D8.1 R67.2 | length 1.8
  Top Layer w0.2: D8.1@52.5,-29.8 52.5,-31.575 R67.2@52.525,-31.6
NetD8_2: D8.2 U16.6 | length 33.4
  Top Layer w0.2: U16.6@31.15,-11.475 33.15,-11.475 36.275,-14.6 41.2,-14.6 44.7,-18.1 v1(44.9,-18.1) ; v1(51.8,-18.1) 52.5,-18.8 D8.2@52.5,-27.8
  Bottom Layer w0.2: v1(44.9,-18.1) v1(51.8,-18.1)
NetD9_1: D9.1 R74.2 | length 1.9
  Bottom Layer w0.2: D9.1@-50.828,1.172 -50.828,0.378 R74.2@-50.025,-0.425
NetD10_1: D10.1 R75.2 | length 2.2
  Bottom Layer w0.2: D10.1@-30.039,15.301 -30.039,13.714 R75.2@-29.625,13.3
NetD11_1: D11.1 R76.2 | length 2
  Bottom Layer w0.2: R76.2@31.2,12.775 31.461,13.036 D11.1@31.461,14.699
NetD12_1: D12.1 R77.2 | length 2.2
  Bottom Layer w0.2: D12.1@52.172,-0.072 52.175,-0.075 R77.2@52.175,-2.275
NetD13_1: D13.1 R78.2 | length 51.8
  Top Layer w0.2: v1(-0.8,15.493) -0.8,17.2 D13.1@0,18 ; v1(-0.4,8.3) 4.793,8.3 7.693,11.2 13.067,11.2 13.572,11.705 16.58,11.705 18.635,9.65 18.635,1.965 R78.2@27.375,-6.775
  Bottom Layer w0.2: v1(-0.8,15.493) -0.707,15.493 -0.275,15.061 -0.275,15.026 -0.175,14.926 -0.175,11.776 -0.4,11.551 v1(-0.4,8.3)
NetD14_1: D14.1 R79.2 | length 22
  Top Layer w0.2: D14.1@17.678,9.546 17.678,1.726 21.304,-1.9 21.349,-1.9 21.7,-2.251 21.7,-2.296 23.854,-4.45 24.095,-4.45 24.745,-5.1 24.949,-5.1 25.3,-5.451 25.3,-5.896 27.375,-7.971 R79.2@27.375,-8.175
NetD15_1: D15.1 R80.2 | length 3.9
  Top Layer w0.2: D15.1@24.2,-7.8 25.65,-7.8 R80.2@27.375,-9.525
NetD16_1: D16.1 R81.2 | length 21.2
  Top Layer w0.2: D16.1@17.666,-23.559 18.741,-23.559 v1(18.8,-23.5) ; v1(20.4,-21.4) 20.6,-21.6 20.556,-21.6 20.2,-21.243 20.35,-21.093 20.35,-20.306 20.2,-20.157 20.2,-14.5 21.9,-12.8 v1(23.3,-12.8) ; v1(27.375,-12.075) R81.2@27.375,-10.825
  Bottom Layer w0.2: v1(18.8,-23.5) 18.8,-23.4 20.4,-21.8 20.6,-21.6 v1(20.4,-21.4) ; v1(23.3,-12.8) 26.65,-12.8 v1(27.375,-12.075)
NetD17_1: D17.1 R82.2 | length 2.1
  Bottom Layer w0.2: R82.2@-5.45,19.425 -5.3,19.575 D17.1@-5.3,21.475
NetD17_2: D17.2 U15.4 | length 37.3
  Bottom Layer w0.2: D17.2@-7.2,21.475 -6.15,20.425 -6.15,14.596 -4.404,12.85 -3.296,12.85 -2.8,12.354 -2.8,9.746 -0.7,7.646 -0.7,4.3 0,3.6 1.509,3.6 2.509,2.6 6.605,2.6 7.305,3.3 9.395,3.3 12.85,-0.155 U15.4@12.85,-0.925
NetD18_1: D18.1 R83.2 | length 2.1
  Bottom Layer w0.2: D18.1@6.975,21.55 6.975,19.55 R83.2@7.05,19.475
NetD18_2: D18.2 U15.5 | length 31.3
  Top Layer w0.2: v1(13.7,1.1) 13.7,1.149 15.6,3.049 15.6,7.049 14.749,7.9 v1(14.129,7.9)
  Bottom Layer w0.2: D18.2@5.075,21.55 5.075,20.296 6.496,18.875 8.339,18.875 9.164,19.7 10.034,19.7 12.201,17.533 12.201,9.827 v1(14.129,7.9) ; U15.5@13.5,-0.925 13.7,-0.725 v1(13.7,1.1)
NetD19_1: D19.1 R84.2 | length 2.3
  Bottom Layer w0.2: D19.1@-18.5,16.77 -18.03,16.3 -16.5,16.3 R84.2@-16.425,16.225
NetD19_2: D19.2 U15.6 | length 73.5
  Bottom Layer w0.2: D19.2@-18.525,14.23 -18.525,15.593 -19.35,16.418 -19.35,17.122 -16.168,20.304 -11.082,20.304 -10.511,20.875 -8.689,20.875 -6.5,18.686 -6.5,11.649 -4.1,9.249 -4.1,0.696 -6.371,-1.575 -7.079,-1.575 -7.225,-1.721 -7.225,-2.829 -6.904,-3.15 0.701,-3.15 0.851,-3.3 1.751,-3.3 7.651,2.6 9.1,2.6 10.475,1.225 10.475,-1.776 12.099,-3.4 13.949,-3.4 14.3,-3.049 14.3,-1.075 U15.6@14.15,-0.925
NetD20_1: D20.1 R85.2 | length 2.6
  Bottom Layer w0.2: R85.2@16.15,16.125 17.855,16.125 D20.1@18.5,16.77
NetD20_2: D20.2 U15.7 | length 18
  Top Layer w0.2: v1(14.7,1.3) 14.7,1.449 16.2,2.949 16.2,8.751 14.7,10.251 v1(14.7,10.455)
  Bottom Layer w0.2: v1(14.7,1.3) 14.7,-0.825 U15.7@14.8,-0.925 ; v1(14.7,10.455) D20.2@18.475,14.23
NetD21_1: D21.1 R86.2 | length 2
  Top Layer w0.2: D21.1@0.8,-31.2 0.85,-31.15 R86.2@0.85,-29.175
NetD21_2: D21.2 U16.4 | length 51.9
  Top Layer w0.2: D21.2@-0.8,-31.2 -0.8,-24.1 v1(2.2,-21.1) ; v1(9.9,-17.8) 9.9,-17.705 12,-15.605 v1(12,-10.6) ; v1(17.1,-9.7) v1(21.9,-9.7) ; v1(26,-9.7) 26,-11.549 27.126,-12.675 27.624,-12.675 28.774,-11.525 29.329,-11.525 30.05,-10.804 30.05,-10.649 30.524,-10.175 U16.4@31.15,-10.175
  Bottom Layer w0.2: v1(2.2,-21.1) 5.5,-17.8 v1(9.9,-17.8) ; v1(12,-10.6) 12.3,-10.3 12.3,-9.851 12.651,-9.5 13.149,-9.5 13.349,-9.7 v1(17.1,-9.7) ; v1(21.9,-9.7) v1(26,-9.7)
NetD22_1: D22.1 R87.2 | length 5.6
  Top Layer w0.2: R87.2@-21.775,-25.45 -17.294,-25.45 D22.1@-16.534,-24.691
NetD22_2: D22.2 U14.4 | length 26.9
  Top Layer w0.2: v1(-31.9,-13.8) -32.15,-13.55 -32.15,-10.749 -31.676,-10.275 U14.4@-31.05,-10.275 ; v1(-25.8,-15.9) -25.532,-15.9 -25,-15.368 -25,-14.951 -24.649,-14.6 -24.151,-14.6 -23.8,-14.951 -23.8,-15.449 -24.151,-15.8 -24.356,-15.8 -24.7,-16.144 -24.7,-17.443 -22.794,-19.35 -21.875,-19.35 D22.2@-17.666,-23.559
  Bottom Layer w0.2: v1(-31.9,-13.8) -31.8,-13.9 -27.8,-13.9 v1(-25.8,-15.9)
NetD23_1: D23.1 R88.2 | length 3.3
  Top Layer w0.2: R88.2@-27.525,-7.8 D23.1@-24.2,-7.8
NetD23_2: D23.2 U14.5 | length 8.3
  Top Layer w0.2: U14.5@-31.05,-9.625 -30.424,-9.625 -29.95,-9.151 -29.95,-9.071 -28.079,-7.2 -27.271,-7.2 -26.271,-6.2 D23.2@-24.2,-6.2
NetD24_1: D24.1 R89.2 | length 2.8
  Top Layer w0.2: D24.1@-16.546,10.678 -16.546,9.421 R89.2@-15.475,8.35
NetD24_2: D24.2 U16.7 | length 66.4
  Top Layer w0.2: D24.2@-17.678,9.546 -17.503,9.721 -17.503,10.781 -16.65,11.635 -16.443,11.635 -14.354,9.546 -9.798,9.546 -9.151,8.9 -8.9,8.9 v1(-8.8,9) ; v1(-6.3,9) v1(-1.8,4.5) ; v1(1.261,3) 7.861,-3.6 19.451,-3.6 19.601,-3.45 20.099,-3.45 20.45,-3.801 20.45,-3.902 21.348,-4.8 23.95,-4.8 24.6,-5.45 24.804,-5.45 24.95,-5.596 24.95,-6.804 24.704,-7.05 23.596,-7.05 23.45,-7.196 23.45,-8.404 23.549,-8.503 23.549,-9.593 26.982,-13.025 27.768,-13.025 28.894,-11.9 30.925,-11.9 U16.7@31.15,-12.125
  Bottom Layer w0.2: v1(-8.8,9) v1(-6.3,9) ; v1(-1.8,4.5) -0.3,3 v1(1.261,3)
NetD25_1: D25.1 R90.2 | length 1.4
  Bottom Layer w0.2: R90.2@-25.275,-80.525 -25.275,-81.875 D25.1@-25.25,-81.9
NetD26_1: D26.1 R91.2 | length 3.6
  Bottom Layer w0.2: D26.1@23.6,-81.9 23.7,-81.8 23.7,-80.351 24.051,-80 25.05,-80 R91.2@25.425,-80.375
NetD27_1: D27.1 Q34.3 | length 3.3
  Top Layer w0.2: Q34.3@-4.8,-35.9 -2.85,-37.85 D27.1@-2.3,-37.85
NetD27_2: D27.2 Q31.3 | length 2.6
  Top Layer w0.2: Q31.3@-4.875,-39.6 D27.2@-2.3,-39.6
NetD27_3: D27.3 Q32.3 | length 3.3
  Top Layer w0.2: Q32.3@-4.75,-43.35 -4.3,-43.35 D27.3@-2.3,-41.35
NetD28_1: D28.1 R95.2 | length 1.7
  Bottom Layer w0.2: R95.2@5.3,-80.375 5.8,-80.875 D28.1@5.8,-81.9
NetD28_2: D28.2 U17.5 | length 14.8
  Bottom Layer w0.2: U17.5@-3.4,-70.4 -2.774,-70.4 -1.95,-71.224 -1.95,-71.534 -1.6,-71.884 -1.6,-76.5 D28.2@3.8,-81.9
NetD29_1: D29.1 R96.2 | length 1.6
  Bottom Layer w0.2: R96.2@10.95,-80.375 11,-80.425 D29.1@11,-82
NetD29_2: D29.2 U17.6 | length 20.8
  Bottom Layer w0.2: U17.6@-3.4,-71.05 -2.774,-71.05 -2.3,-71.524 -2.3,-71.679 -1.95,-72.029 -1.95,-77.201 -1.7,-77.451 -1.7,-77.754 3.196,-82.65 8.35,-82.65 D29.2@9,-82
NetD30_1: D30.1 R97.2 | length 1.8
  Bottom Layer w0.2: R97.2@16.175,-80.2 16.2,-80.225 D30.1@16.2,-82
NetD30_2: D30.2 U17.7 | length 26.7
  Top Layer w0.2: v1(-2.3,-77.7) -0.2,-79.8 4,-79.8 v1(4.1,-79.7)
  Bottom Layer w0.2: U17.7@-3.4,-71.7 -2.774,-71.7 -2.3,-72.174 v1(-2.3,-77.7) ; v1(4.1,-79.7) 4.25,-79.55 13.229,-79.55 14.2,-80.521 D30.2@14.2,-82 D30.2@13.8,-81.6
NetD31_1: D31.1 R106.1 | length 1.3
  Top Layer w0.2: R106.1@2.875,-80.7 2.9,-80.725 D31.1@2.9,-82
NetD32_1: D32.1 R107.1 | length 1.3
  Top Layer w0.2: R107.1@16.525,-80.575 16.55,-80.6 D32.1@16.55,-81.9
NetD35_1: D35.1 R133.2 | length 1.8
  Bottom Layer w0.2: R133.2@-13,-81.85 -11.3,-81.85 D35.1@-11.25,-81.8
NetD35_2: D35.2 U13.6 | length 71.1
  Top Layer w0.2: v1(-0.6,-43.5) -0.2,-43.1 -0.2,-35.71 -0.3,-35.61 -0.3,-35.251 -0.252,-35.3 v1(-0.2,-35.3)
  Bottom Layer w0.2: D35.2@-9.35,-81.8 -4.5,-76.95 -4.5,-69.771 -5.788,-68.483 -5.788,-67.82 -5.993,-67.615 -5.993,-65.308 -7.752,-63.55 -8.642,-63.55 -10.7,-61.492 -10.7,-48.856 -8.744,-46.9 -7.451,-46.9 -7.201,-47.15 -4.595,-47.15 -0.945,-43.5 v1(-0.6,-43.5) ; v1(-0.2,-35.3) -0.252,-35.3 -0.3,-35.251 0.049,-35.251 0.1,-35.2 0.595,-35.2 2.825,-32.97 2.825,-30.61 1.1,-28.885 U13.6@1.1,-25.875
NetD36_1: D36.1 R134.2 | length 1.5
  Top Layer w0.2: D36.1@-51.125,-25.45 R134.2@-49.625,-25.45
NetD36_2: D36.2 U14.6 | length 38.3
  Top Layer w0.2: D36.2@-51.125,-23.55 -48.725,-21.15 -48.725,-10.22 -43.905,-5.4 -38.851,-5.4 -38.451,-5.8 -31.649,-5.8 -29.95,-7.499 -29.95,-8.501 -30.199,-8.75 -30.825,-8.75 U14.6@-31.05,-8.975
NetD37_1: D37.1 Q37.3 | length 8.1
  Top Layer w0.2: D37.1@-52.45,-27.825 -51.125,-26.5 -45.125,-26.5 Q37.3@-44.95,-26.325
NetJ1_1: J1.1 U23.5 | length 52.4
  Top Layer w0.2: J1.1@9.375,-45.321 J1.1@9.375,-45.475 9.375,-51.07 9.6,-51.295 9.6,-51.649 9.951,-52 10.449,-52 10.699,-51.75 10.815,-51.75 14.125,-55.06 14.125,-58.14 13.675,-58.59 v2(13.675,-60.125) ; U23.5@9.65,-75.436 9.75,-75.336 9.75,-75.073 9.896,-74.926 10.404,-74.926 11.5,-76.023 v2(11.5,-76.1)
  Bottom Layer w0.2: v2(11.5,-76.1) 11.2,-76.1 11.1,-76.2 6.868,-76.2 6.818,-76.25 3.601,-76.25 2.3,-74.949 2.3,-70.09 2.525,-69.865 2.525,-68.908 3.1,-68.333 3.1,-66.586 5.986,-63.7 10.1,-63.7 10.8,-63 10.8,-62.851 13.526,-60.125 v2(13.675,-60.125)
NetJ1_2: J1.2 U19.34 | length 6
  Top Layer w0.2: J1.2@8.575,-45.629 J1.2@8.575,-45.475 8.575,-45.321 8.971,-44.925 9.825,-44.925 10.575,-45.675 11.516,-45.675 11.75,-45.441 ; 11.75,-45.441 11.85,-45.341 U19.34@11.85,-44.525 11.75,-44.625 11.75,-45.441
NetLS1_2: LS1.2 U25.8 | length 14.4
  Top Layer w0.3: U25.8@-10.8,-58.57 -10.245,-59.125 -6.906,-59.125 -4.1,-61.931 -4.1,-62.751 -2.491,-64.36 LS1.2@0.7,-64.36
NetQ1_1: Q1.1 Q3.3 R1.2 | length 5
  Bottom Layer w0.2: Q3.3@9.15,9.225 9.15,10.2 Q1.1@10.15,11.2 11.65,9.7 R1.2@11.65,9.225
NetQ1_2: Q1.2 Q3.1 R3.2 | length 6.7
  Bottom Layer w0.2: Q1.2@8.25,11.2 8.25,8.821 9.946,7.125 Q3.1@10.1,7.125 9.9,6.925 R3.2@9.9,5.425
NetQ1_3: Q1.3 U2.1 | length 2.8
  Bottom Layer w0.2: Q1.3@9.2,13.3 9.2,16.14 U2.1@9.202,16.141
NetQ2_1: Q2.1 Q4.3 R2.2 | length 5.3
  Bottom Layer w0.2: R2.2@-14.05,9.3 -13.975,9.225 Q4.3@-11.15,9.225 -10.25,10.125 Q2.1@-10.25,11.2
NetQ2_2: Q2.2 Q4.1 R5.2 | length 9.8
  Bottom Layer w0.2: Q2.2@-12.15,11.2 -11.75,11.2 -10.85,12.1 -9.846,12.1 -9.7,11.954 -9.7,7.625 Q4.1@-10.2,7.125 -10.2,5.45 R5.2@-10.375,5.275
NetQ2_3: Q2.3 U3.1 | length 6
  Bottom Layer w0.2: Q2.3@-11.2,13.3 -10.253,14.247 -10.253,16.601 -9.6,17.254 U3.1@-9.6,18.675
NetQ5_1: Q5.1 Q10.3 R41.1 | length 4
  Top Layer w0.2: R41.1@-37.725,-3.65 -37.675,-3.6 Q5.1@-37.675,-2.075 -36.675,-2.075 Q10.3@-35.7,-1.1
NetQ5_2: Q5.2 Q10.1 R36.2 | length 6.8
  Top Layer w0.2: Q5.2@-37.675,-0.175 -35.321,-0.175 -33.6,-1.896 Q10.1@-33.6,-2.05 -31.875,-2.05 R36.2@-31.75,-1.925
NetQ5_3: Q5.3 U6.1 | length 5.7
  Top Layer w0.2: v1(-42.8,1) -42.123,1.677 U6.1@-42.123,2.265 ; v1(-41.2,-0.8) -40.875,-1.125 Q5.3@-39.775,-1.125
  Bottom Layer w0.2: v1(-42.8,1) -42.9,0.9 v1(-41.2,-0.8)
NetQ6_1: Q6.1 Q11.3 R32.2 | length 4.7
  Top Layer w0.2: Q11.3@-28.225,5.35 -27.175,5.35 Q6.1@-26.225,6.3 -26.225,6.725 R32.2@-24.9,8.05
NetQ6_2: Q6.2 Q11.1 R37.2 | length 6.9
  Top Layer w0.2: R37.2@-32.225,6.2 -30.425,6.2 Q11.1@-30.325,6.3 -30.325,6.146 -28.979,4.8 -26.625,4.8 Q6.2@-26.225,4.4
NetQ6_3: Q6.3 U7.1 | length 9.8
  Top Layer w0.2: Q6.3@-24.125,5.35 -23.801,5.35 -22.85,6.301 -22.85,8.45 v1(-22.8,8.5) ; v1(-22.6,12.8) -21.966,13.434 U7.1@-21.373,13.434
  Bottom Layer w0.2: v1(-22.8,8.5) -22.6,8.7 v1(-22.6,12.8)
NetQ7_1: Q7.1 Q12.3 R33.2 | length 4.5
  Bottom Layer w0.2: Q12.3@2.15,8.7 3.175,9.725 Q7.1@3.175,10.525 ; Q7.1@3.175,10.55 Q7.1@3.175,10.525 ; R33.2@4.775,8.925 Q7.1@3.175,10.525
NetQ7_2: Q7.2 Q12.1 R38.2 | length 6.5
  Bottom Layer w0.2: Q7.2@1.275,10.55 1.275,8.271 2.946,6.6 Q12.1@3.1,6.6 2.825,6.325 R38.2@2.825,4.975
NetQ7_3: Q7.3 U8.1 | length 5.2
  Top Layer w0.2: U8.1@1.95,16.85 v1(3.3,15.5)
  Bottom Layer w0.2: Q7.3@2.225,12.65 3.3,13.725 v1(3.3,15.5)
NetQ8_1: Q8.1 Q13.3 R34.2 | length 4.5
  Top Layer w0.2: Q8.1@28.1,4.925 29.35,4.925 ; R34.2@29.85,3.125 29.85,4.425 29.35,4.925 ; Q13.3@30.25,5.825 29.35,4.925
NetQ8_2: Q8.2 Q13.1 R39.2 | length 7.1
  Top Layer w0.2: Q8.2@28.1,6.825 30.554,6.825 32.35,5.029 Q13.1@32.35,4.875 34.25,4.875 R39.2@34.275,4.85
NetQ8_3: Q8.3 U9.1 | length 7.2
  Top Layer w0.2: U9.1@25.122,12.069 25.431,12.069 26.2,11.3 v1(26.4,11.3) ; Q8.3@26,5.875 v1(26,7.1)
  Bottom Layer w0.2: v1(26,7.1) 26,10.9 v1(26.4,11.3)
NetQ9_1: Q9.1 Q14.3 R35.2 | length 5.7
  Top Layer w0.2: R35.2@34.725,0.025 34.854,0.025 37.025,-2.146 Q14.3@37.025,-2.3 37.975,-1.35 Q9.1@39.025,-1.35
NetQ9_2: Q9.2 Q14.1 R40.2 | length 7
  Top Layer w0.2: R40.2@33,-1.55 33.2,-1.35 Q14.1@34.925,-1.35 34.925,-1.504 36.671,-3.25 Q9.2@39.025,-3.25
NetQ9_3: Q9.3 U10.1 | length 6.3
  Top Layer w0.2: Q9.3@41.125,-2.3 42.1,-2.3 v1(42.3,-2.1) ; v1(44.1,0.6) 44.2,0.7 45.198,-0.298 U10.1@45.198,-0.316
  Bottom Layer w0.2: v1(42.3,-2.1) 42.3,-1.419 44.1,0.381 v1(44.1,0.6)
NetQ15_1: Q15.1 Q17.3 R52.2 | length 4.5
  Top Layer w0.2: Q17.3@-32.35,-68.175 -32.35,-69.325 Q15.1@-31.4,-70.275 -30.125,-70.275 R52.2@-29.625,-69.775
NetQ15_2: Q15.2 Q17.1 R54.2 | length 7.2
  Top Layer w0.2: Q15.2@-33.3,-70.275 -33.1,-70.075 -33.1,-67.621 -31.554,-66.075 Q17.1@-31.4,-66.075 -31.4,-64.125 R54.2@-31.55,-63.975
NetQ15_3: Q15.3 U11.1 | length 4.1
  Top Layer w0.2: U11.1@-32.671,-76.35 -32.35,-76.028 Q15.3@-32.35,-72.375
NetQ16_1: Q16.1 Q18.3 R53.2 | length 5.1
  Top Layer w0.2: R53.2@26.35,-67.8 26.4,-67.85 Q18.3@28.85,-67.85 29.8,-68.8 Q16.1@29.8,-70.05
NetQ16_2: Q16.2 Q18.1 R55.2 | length 10.8
  Top Layer w0.2: Q16.2@27.9,-70.05 27.446,-70.05 25.65,-68.254 25.65,-67.346 25.796,-67.2 27.9,-67.2 29.35,-65.75 Q18.1@29.8,-65.75 29.8,-63.95 R55.2@29.575,-63.725
NetQ16_3: Q16.3 U12.1 | length 4.3
  Top Layer w0.2: U12.1@28.652,-76.35 28.652,-72.348 Q16.3@28.85,-72.15
NetQ19_1: Q19.1 Q21.3 R57.2 | length 8.1
  Bottom Layer w0.2: Q19.1@-34.075,-20.075 -33,-20.075 Q21.3@-32.075,-21 -26.5,-21 R57.2@-26.375,-20.875
NetQ19_2: Q19.2 Q21.1 R68.2 | length 10
  Bottom Layer w0.2: Q19.2@-34.075,-21.975 -34.075,-21.379 -34.975,-20.479 -34.975,-19.671 -34.829,-19.525 -30.5,-19.525 Q21.1@-29.975,-20.05 -28.025,-20.05 R68.2@-27.95,-20.125
NetQ20_1: Q20.1 Q23.3 R59.2 | length 8.1
  Bottom Layer w0.2: Q20.1@-34.05,-23.875 -33.05,-23.875 Q23.3@-32.2,-24.725 -32.025,-24.55 R59.2@-26.375,-24.55
NetQ20_2: Q20.2 Q23.1 R69.2 | length 10
  Bottom Layer w0.2: Q20.2@-34.05,-25.775 -34.05,-25.179 -34.95,-24.279 -34.95,-23.471 -34.804,-23.325 -30.55,-23.325 Q23.1@-30.1,-23.775 -27.875,-23.775 R69.2@-27.85,-23.8
NetQ22_1: Q22.1 Q24.3 R61.2 | length 8
  Bottom Layer w0.2: Q22.1@-34.1,-16.175 -32.9,-16.175 Q24.3@-32.1,-16.975 -26.775,-16.975 R61.2@-26.55,-16.75
NetQ22_2: Q22.2 Q24.1 R70.2 | length 10
  Bottom Layer w0.2: Q22.2@-34.1,-18.075 -34.1,-17.479 -35,-16.579 -35,-15.771 -34.854,-15.625 -30.4,-15.625 Q24.1@-30,-16.025 -27.95,-16.025 R70.2@-27.9,-16.075
NetQ25_1: Q25.1 Q27.3 R63.2 | length 8.2
  Bottom Layer w0.2: R63.2@26.425,-20.925 31.925,-20.925 Q27.3@31.975,-20.875 32.975,-21.875 Q25.1@34.225,-21.875
NetQ25_2: Q25.2 Q27.1 R71.2 | length 10.4
  Bottom Layer w0.2: R71.2@27.775,-21.725 29.775,-21.725 Q27.1@29.875,-21.825 30.475,-22.425 34.979,-22.425 35.125,-22.279 35.125,-21.471 34.225,-20.571 Q25.2@34.225,-19.975
NetQ26_1: Q26.1 Q29.3 R64.2 | length 8.4
  Bottom Layer w0.2: R64.2@26.325,-17.775 31.85,-17.775 Q29.3@32.025,-17.6 32.975,-18.55 Q26.1@34.225,-18.55
NetQ26_2: Q26.2 Q29.1 R72.2 | length 10.3
  Bottom Layer w0.2: R72.2@27.8,-18.55 Q29.1@29.925,-18.55 30.45,-18.55 31,-19.1 34.979,-19.1 35.125,-18.954 35.125,-18.146 34.225,-17.246 Q26.2@34.225,-16.65
NetQ28_1: Q28.1 Q30.3 R65.2 | length 8.2
  Bottom Layer w0.2: R65.2@26.4,-24.525 26.55,-24.375 Q30.3@32,-24.375 32.8,-25.175 Q28.1@34.175,-25.175
NetQ28_2: Q28.2 Q30.1 R73.2 | length 10.1
  Bottom Layer w0.2: R73.2@27.9,-25.275 29.85,-25.275 Q30.1@29.9,-25.325 30.3,-25.725 34.929,-25.725 35.1,-25.554 35.1,-24.354 34.175,-23.429 Q28.2@34.175,-23.275
NetQ31_1: Q31.1 Q33.3 R92.2 | length 9.7
  Top Layer w0.2: R92.2@-14.775,-39.475 -14.775,-39.346 -13.404,-37.975 -10.421,-37.975 -8.925,-39.471 Q33.3@-8.925,-39.625 -7.95,-38.65 Q31.1@-6.975,-38.65
NetQ31_2: Q31.2 Q33.1 R98.2 | length 6.7
  Top Layer w0.2: R98.2@-12.8,-38.725 -11.075,-38.725 Q33.1@-11.025,-38.675 -11.025,-38.829 -9.304,-40.55 Q31.2@-6.975,-40.55
NetQ32_1: Q32.1 Q35.3 R93.2 | length 6.6
  Top Layer w0.2: Q35.3@-8.875,-43.35 -7.925,-42.4 Q32.1@-6.85,-42.4 -5.95,-43.3 -5.95,-45.525 R93.2@-6.425,-46
NetQ32_2: Q32.2 Q35.1 R99.2 | length 6.8
  Top Layer w0.2: R99.2@-12.775,-42.425 -12.75,-42.4 Q35.1@-10.975,-42.4 -10.975,-42.554 -9.229,-44.3 Q32.2@-6.85,-44.3
NetQ34_1: Q34.1 Q36.3 R94.2 | length 5
  Top Layer w0.2: R94.2@-9.05,-33.375 -9.05,-35.8 Q36.3@-8.95,-35.9 -8,-34.95 Q34.1@-6.9,-34.95
NetQ34_2: Q34.2 Q36.1 R100.2 | length 6.9
  Top Layer w0.2: R100.2@-12.875,-35.025 -12.8,-34.95 Q36.1@-11.05,-34.95 -11.05,-35.104 -9.304,-36.85 Q34.2@-6.9,-36.85
NetQ37_1: Q37.1 Q38.3 R142.1 | length 9.6
  Top Layer w0.2: Q37.1@-42.85,-27.275 -41.625,-27.275 Q38.3@-40.725,-26.375 -43.154,-26.375 -43.75,-25.779 -43.75,-24.971 -42.904,-24.125 R142.1@-41.05,-24.125
NetQ37_2: Q37.2 Q38.1 R135.2 | length 7
  Top Layer w0.2: Q37.2@-42.85,-25.375 -40.421,-25.375 -38.625,-27.171 Q38.1@-38.625,-27.325 -36.95,-27.325 R135.2@-36.775,-27.15
NetR1_1: R1.1 U19.64 | length 54.5
  Top Layer w0.2: v1(10.7,3.3) v1@10.7,5.6 ; v1(17.251,-8.7) 16.5,-9.451 16.5,-11.934 15.9,-12.534 15.9,-13.748 18.8,-16.649 18.8,-21.824 19.226,-22.25 ; 19.318,-22.25 20.05,-22.982 20.05,-24.018 19.9,-24.168 19.9,-24.972 20.1,-25.172 v1(20.1,-26.3) ; U19.64@20.65,-35.225 v1@20.65,-32.15
  Bottom Layer w0.2: v1@10.8,3.4 17,3.4 17.2,3.2 v1@17.2,-8.649 ; v1@10.8,5.8 11.65,6.65 R1.1@11.65,7.725 ; v1(20.1,-26.3) 20.225,-26.425 21.363,-26.425 22.55,-27.611 22.55,-29.883 21.383,-31.05 20.858,-31.05 20.656,-31.251 v1@20.656,-32.044
  other v1: 20.6,-32.1 10.8,5.7
NetR2_1: R2.1 U19.63 | length 77
  Top Layer w0.2: v1(-13.6,6.4) -13.6,1.9 -13.5,1.8 v1(-13.5,1.9) ; v1(-1.6,-15) -1.55,-14.95 -1.55,-16.604 -1.404,-16.75 -0.196,-16.75 0.05,-16.504 0.05,-15.396 0.196,-15.25 1.404,-15.25 1.55,-15.396 1.55,-19.601 2.8,-20.851 2.8,-27.2 v1(3.4,-27.8) ; U19.63@20.65,-35.725 20.55,-35.625 19.734,-35.625 19.5,-35.391 19.5,-34.825 20,-34.325 20,-33.551 19.734,-33.286 19.734,-30.466 20.9,-29.3 20.9,-29.2 v1(20.8,-29.3)
  Bottom Layer w0.2: R2.1@-14.05,7.8 -14.05,6.85 v1(-13.6,6.4) ; v1(-13.5,1.9) -13.575,1.825 -13.575,-2.193 -11.647,-4.121 -11.647,-6.039 -11.5,-6.186 -11.5,-6.299 -11.296,-6.503 -10.942,-6.503 -8.695,-8.75 -8.506,-8.75 -5.926,-11.33 -5.926,-11.795 -2.721,-15 v1(-1.6,-15) v1@-1.6,-14.9 ; v1(3.4,-27.8) 4.5,-26.7 10.456,-26.7 10.807,-26.35 11.593,-26.35 12.594,-27.35 15.201,-27.35 15.651,-26.9 17.048,-26.9 17.499,-27.35 18.95,-27.35 v1@20.85,-29.25 ; v1(20.8,-29.3) v1@20.85,-29.25 ; v1@20.85,-29.25 20.9,-29.2 20.9,-29.3 v1@20.85,-29.25
NetR4_2: R4.2 U2.3 U19.17 | length 66.8
  Top Layer w0.2: U19.17@9.55,-35.225 v1(9.55,-31.35) ; v1(11.2,-27.3) 11.2,-20.296 11.496,-20 11.848,-20 12.2,-19.648 12.2,-19.151 11.849,-18.8 11.461,-18.8 10.8,-18.139 10.8,-17.3 12.9,-15.2 12.9,-14.507 12.6,-14.207 12.6,-11.802 12.9,-11.502 v1(12.9,-10.1) ; v1(16.4,9.4) 16.6,9.2 v1(16.6,2.5)
  Bottom Layer w0.2: v1(9.55,-31.35) 9.55,-28.95 v1(11.2,-27.3) ; v1(12.9,-10.1) 12.9,-10.549 12.249,-11.2 11.751,-11.2 11.4,-10.849 11.4,-10.257 12.507,-9.15 15.799,-9.15 16.2,-8.749 16.2,2.1 v1(16.6,2.5) ; U2.3@13.648,18.009 14.301,17.356 14.301,13.301 R4.2@14.225,13.225 14.925,12.525 14.925,11.271 14.779,11.125 14.521,11.125 14.1,10.704 14.1,10.206 14.706,9.6 16.4,9.6 v1(16.4,9.4)
NetR6_2: R6.2 U3.3 U19.11 | length 67.9
  Top Layer w0.2: U3.3@-13.252,15.525 -10.627,12.9 v1(-9.6,12.9) ; v1(-6.4,10) -6.4,9.949 -5.7,9.249 -5.7,9.151 -3.949,7.4 v1(-2.8,7.4) ; v1(1.9,-2.1) 3.4,-3.6 3.4,-4.549 5.851,-7 6.148,-7 6.7,-7.552 6.7,-7.843 8.156,-9.3 8.448,-9.3 9.3,-10.152 9.3,-16.9 9.1,-17.1 9.1,-17.257 8.15,-18.207 8.15,-21.043 8.9,-21.793 8.9,-22.195 9.05,-22.345 9.05,-23.001 8.85,-23.201 8.85,-23.699 9.05,-23.899 9.05,-27.804 10.246,-29 10.523,-29 11.9,-30.377 11.9,-30.654 13.85,-32.604 U19.11@13.85,-33.425
  Bottom Layer w0.2: R6.2@-13.975,13.175 -13.252,13.898 U3.3@-13.252,15.525 ; v1(-9.6,12.9) -9.6,12.4 -7.2,10 v1(-6.4,10) ; v1(-2.8,7.4) -2.9,7.3 -2.9,1.751 -2.549,1.4 0.149,1.4 1.9,-0.351 v1(1.9,-2.1)
NetR7_1: R7.1 U4.1 U19.18 | length 52
  Top Layer w0.2: v1(-8.4,-10.2) -8.5,-10.2 -7.521,-10.2 -4.988,-12.733 -4.16,-12.733 -3.012,-11.585 -1.438,-11.585 -0.92,-12.103 -0.92,-12.562 0.718,-14.2 1.838,-14.2 2.6,-14.962 2.6,-18.056 6.05,-21.507 6.05,-21.913 6.75,-22.613 6.75,-24.568 6.95,-24.768 6.95,-29.018 6.625,-29.343 6.625,-33.616 8.634,-35.625 9.45,-35.625 U19.18@9.55,-35.725
  Bottom Layer w0.2: R7.1@-18.475,-7.025 -18.301,-7.025 U4.1@-16.151,-4.875 -14.825,-4.875 -13.9,-5.8 -12.876,-5.8 -12.2,-6.476 -12.2,-6.589 -11.585,-7.203 -11.497,-7.203 -8.5,-10.2 v1(-8.4,-10.2)
NetR7_2: R7.2 R21.2 U4.2 | length 4.6
  Bottom Layer w0.2: R21.2@-20.225,-5.4 -18.5,-5.4 -18.475,-5.425 -18.226,-5.425 -17.251,-4.45 -16.376,-4.45 U4.2@-16.151,-4.225
NetR8_1: R8.1 U4.7 U19.8 | length 65.6
  Top Layer w0.2: v2(-15.238,-0.4) -13.1,-2.538 v2(-13.1,-6.849) ; v2(-10,-10) -9.949,-10 -9.849,-10.1 -11.599,-11.85 -12.093,-11.85 -12.4,-12.156 -12.4,-12.849 -12.65,-13.099 -12.65,-13.193 -12.094,-13.75 -11.952,-13.75 -11.619,-14.083 -2.76,-14.083 -2.382,-13.705 -1.293,-13.705 -1.067,-13.479 -0.993,-13.479 0.429,-14.9 1.549,-14.9 1.9,-15.251 1.9,-19.456 3.15,-20.707 3.15,-25.95 v2(5.7,-28.5) ; U19.8@15.35,-33.425 15.35,-34.524 v2(15.576,-34.75)
  Bottom Layer w0.2: R8.1@-18.475,1.2 -18.326,1.2 U4.7@-16.151,-0.975 -15.576,-0.4 v2(-15.238,-0.4) ; v2(-13.1,-6.849) -9.949,-10 v2(-10,-10) ; v2(5.7,-28.5) 11.95,-34.75 v2(15.576,-34.75)
NetR8_2: R8.2 R22.2 U4.6 | length 4.5
  Bottom Layer w0.2: R22.2@-20.15,-0.425 -18.5,-0.425 -18.475,-0.4 -17.25,-1.625 U4.6@-16.151,-1.625
NetR9_1: R9.1 U4.8 U19.21 | length 66
  Top Layer w0.2: v1(-12.4,-5.3) -12.4,-2.7 -12.75,-2.35 -12.75,-1.701 -12.049,-1 v1(-12,-1) ; v1(-9.093,-10.793) -9.593,-10.793 -11,-12.2 -11.649,-12.2 -12,-12.551 -12,-13.349 -11.949,-13.4 -11.807,-13.4 -11.474,-13.733 -2.905,-13.733 -2.527,-13.355 -1.438,-13.355 -1.212,-13.129 -0.848,-13.129 0.573,-14.55 1.693,-14.55 2.25,-15.107 2.25,-18.201 5.7,-21.651 5.7,-22.058 6.4,-22.758 6.4,-24.713 6.6,-24.913 6.6,-28.873 6.275,-29.198 6.275,-37.554 6.421,-37.7 7.675,-37.7 8.15,-37.225 U19.21@9.55,-37.225
  Bottom Layer w0.2: v1@-12.4,-5.399 -11.997,-5.802 -11.997,-6.184 -11.85,-6.331 -11.85,-6.444 -11.44,-6.853 -11.087,-6.853 -8.84,-9.1 -8.651,-9.1 -7.8,-9.951 -7.8,-10.449 -8.151,-10.8 -9.1,-10.8 v1(-9.093,-10.793) ; v1(-12,-1) -10.476,-1 U4.8@-10.451,-0.975 -10.075,-0.975 R9.1@-8.175,0.925
NetR9_2: R9.2 R23.2 U4.9 | length 6.9
  Top Layer w0.2: v1@-12.4,-1.95 -12.1,-1.65 v1(-12.1,-1.9)
  Bottom Layer w0.2: v1(-12.1,-1.9) -12.1,-1.65 -12.075,-1.625 U4.9@-10.451,-1.625 -10.351,-1.525 -9.025,-1.525 -8.175,-0.675 R23.2@-6.575,-0.675
NetR10_1: R10.1 U4.14 U19.6 | length 57.9
  Top Layer w0.2: v1(7.4,-6.7) 7.4,-7.554 8.446,-8.6 10.349,-8.6 10.7,-8.951 10.7,-16.151 8.5,-18.351 8.5,-20.899 9.25,-21.649 9.25,-22.05 9.45,-22.25 v1(9.45,-23.45) ; v1(14.2,-23.7) 16.8,-26.3 v1(16.8,-27.5) ; U19.6@16.35,-33.425 16.35,-32.449 16.475,-32.324 16.475,-30.473 16.994,-29.954 v1(16.994,-29.774)
  Bottom Layer w0.2: U4.14@-10.451,-4.875 R10.1@-8.376,-6.95 ; R10.1@-8.375,-6.9 -8.375,-6.95 -8.375,-7.574 -7.648,-8.3 -6.303,-8.3 -5.051,-7.049 -5.051,-6.554 -4.298,-5.8 6.401,-5.8 7.301,-6.7 v1(7.4,-6.7) ; v1(9.45,-23.45) 11.15,-23.45 11.4,-23.7 v1(14.2,-23.7) ; v1(16.8,-27.5) 16.9,-27.6 16.9,-29.679 v1(16.994,-29.774)
NetR10_2: R10.2 R24.2 U4.13 | length 4.2
  Bottom Layer w0.2: U4.13@-10.451,-4.225 -9.5,-4.225 -8.375,-5.35 -6.725,-5.35 R24.2@-6.7,-5.325